# EAGLE board table_tiles_tlc (EAGLE 5.11)
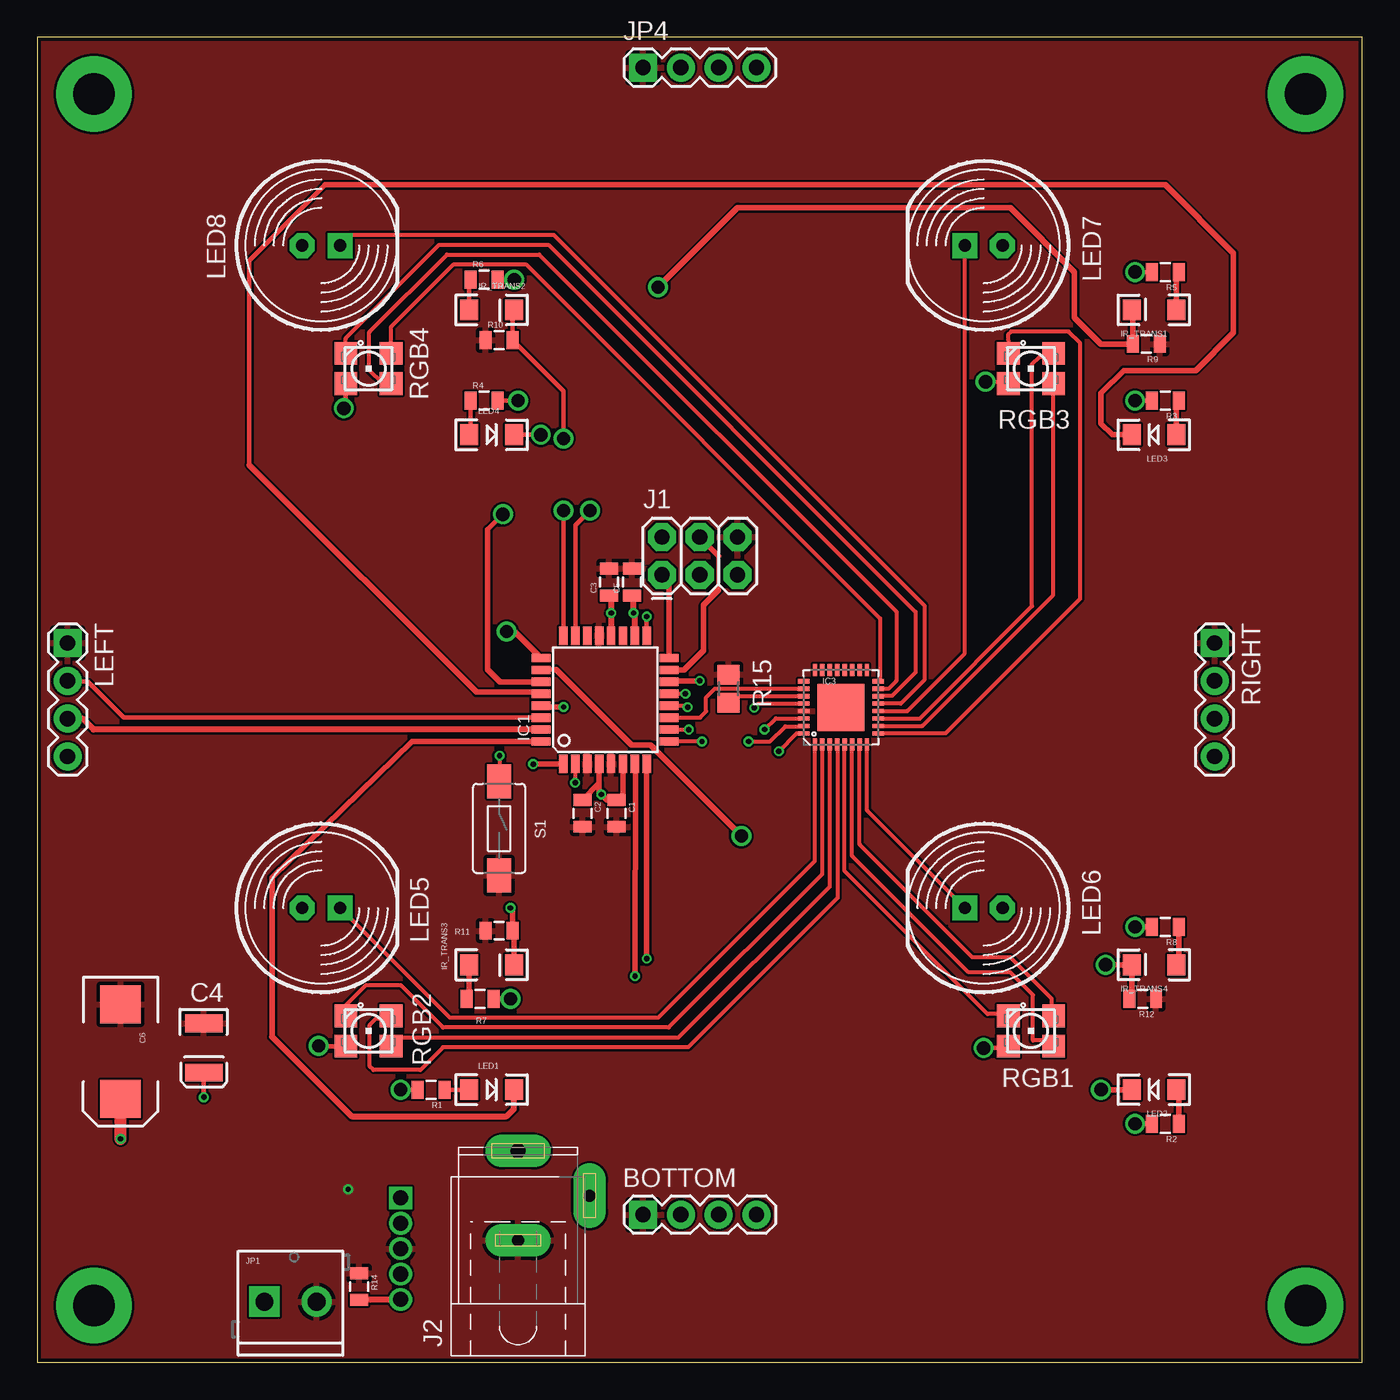
[diagram p0: board, top side]
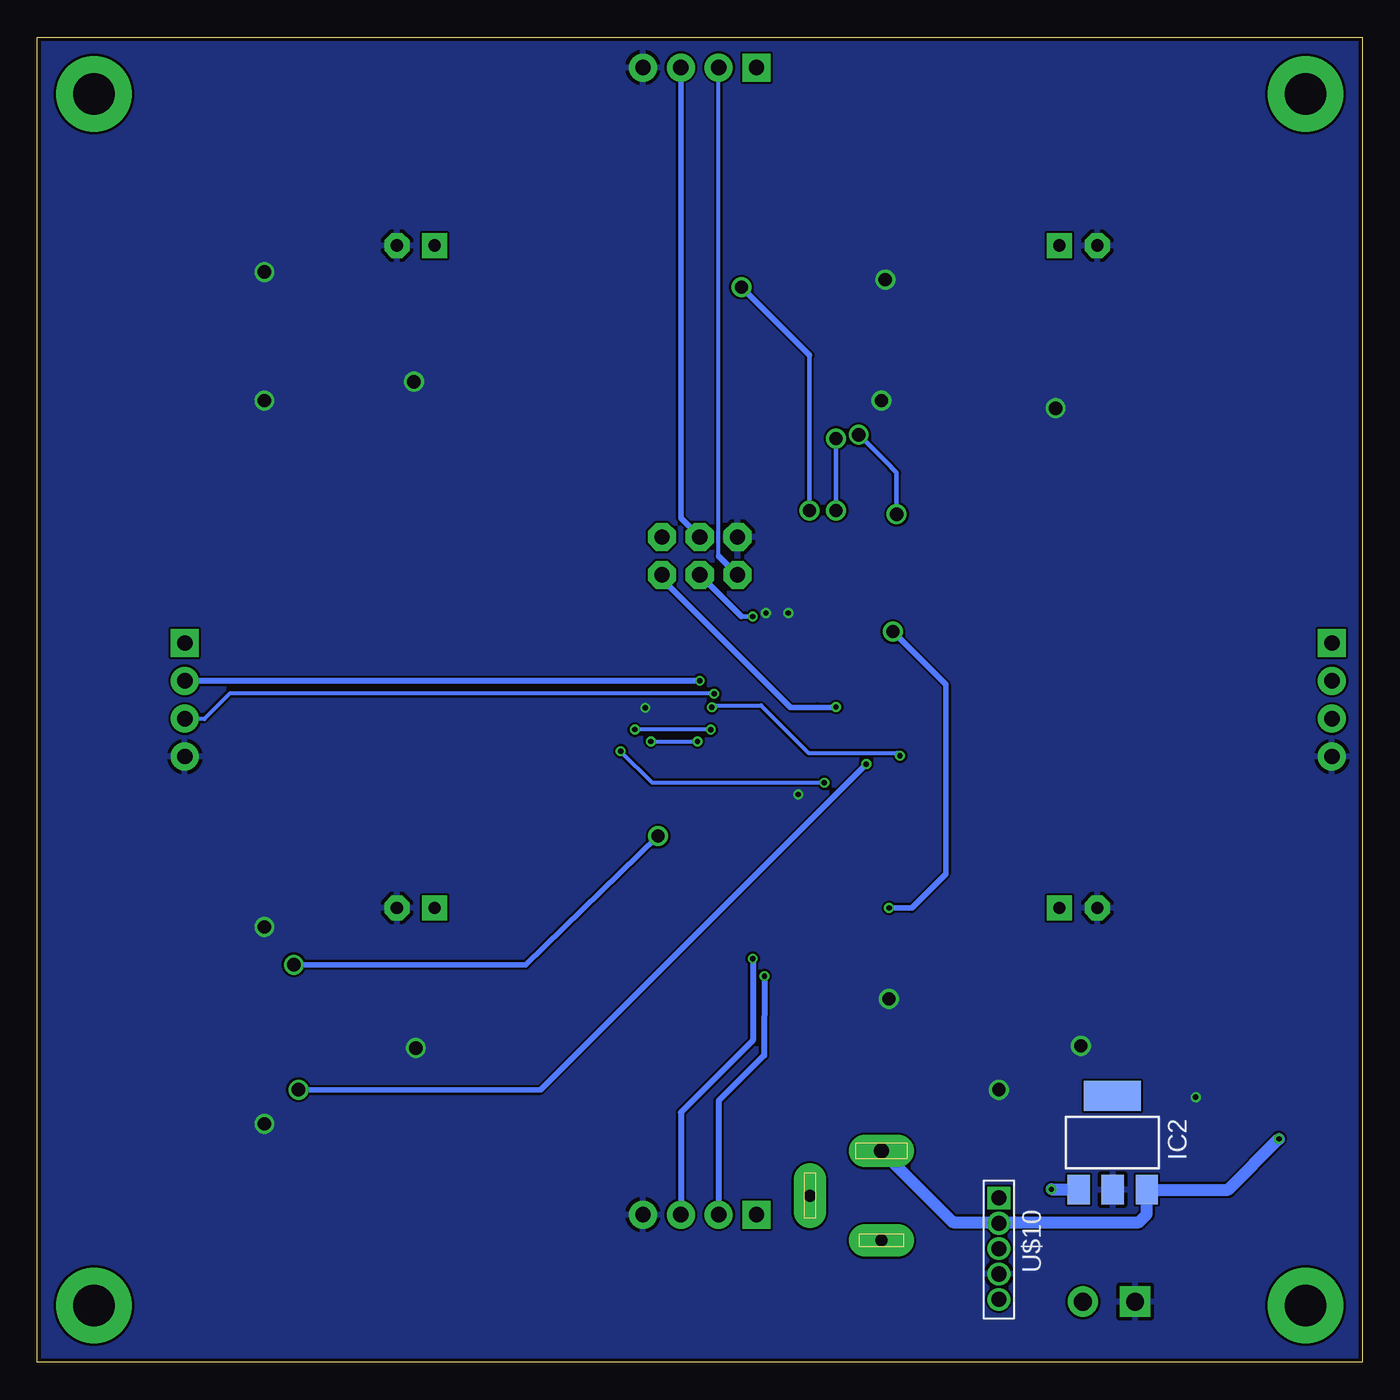
[diagram p1: board, bottom side, seen from below]

Size 88.9 x 88.9 mm. Coordinates in mm from the lower left corner, seen from the top.
Outline: 0,0 88.9,0 88.9,88.9 0,88.9 0,0
Copper layers (1*16): Top 0.035mm / dielectric 1.5mm / Bottom 0.035mm
Design rules "ITead_rule": minimum track width 6mil, minimum drill 12mil, track to track 6mil, track to pad 6mil, pad to pad 6mil, via to via 6mil, smd to smd 0mil, copper to edge 10mil, drill to drill 10mil, minimum pad ring 10mil, minimum via ring 6mil, stop-mask expansion 2mil, vias tented up to drill 100mil, thermal gap 10mil

## Footprints (pad centres in the part's own frame; a part is rotated, then mirrored left to right if it is on the bottom)
1X04 = drill 1.016 pad 1.88 square: 1 0,0 | drill 1.016 pad 1.88 round: 2 2.54,0; 3 5.08,0; 4 7.62,0
0805 = smd 0.8 x 1.2: 1 -0.9,0; 2 0.9,0
EIA3528 = smd 1.2 x 2.5: A 1.65,0; C -1.65,0
EIA7343 = smd 2.55 x 2.7: A 3.17,0; C -3.17,0
TQFP32-08 = smd 1.27 x 0.559: 1 -4.293,2.8; 2 -4.293,2; 3 -4.293,1.2; 4 -4.293,0.4; 5 -4.293,-0.4; 6 -4.293,-1.2; 7 -4.293,-2; 8 -4.293,-2.8; 17 4.293,-2.8; 18 4.293,-2; 19 4.293,-1.2; 20 4.293,-0.4; 21 4.293,0.4; 22 4.293,1.2; 23 4.293,2; 24 4.293,2.8 | smd 0.559 x 1.27: 9 -2.8,-4.293; 10 -2,-4.293; 11 -1.2,-4.293; 12 -0.4,-4.293; 13 0.4,-4.293; 14 1.2,-4.293; 15 2,-4.293; 16 2.8,-4.293; 25 2.8,4.293; 26 2,4.293; 27 1.2,4.293; 28 0.4,4.293; 29 -0.4,4.293; 30 -1.2,4.293; 31 -2,4.293; 32 -2.8,4.293
SOT223 = smd 1.499 x 2.007: 1 -2.261,-3.15; 2 0.025,-3.15; 3 2.311,-3.15 | smd 3.81 x 2.007: 4 0,3.15
QFN32_XLP = smd 0.285 x 0.8: 1 -1.75,-2.5; 2 -1.25,-2.5; 3 -0.75,-2.5; 4 -0.25,-2.5; 5 0.25,-2.5; 6 0.75,-2.5; 7 1.25,-2.5; 8 1.75,-2.5; 17 1.75,2.5; 18 1.25,2.5; 19 0.75,2.5; 20 0.25,2.5; 21 -0.25,2.5; 22 -0.75,2.5; 23 -1.25,2.5; 24 -1.75,2.5 | smd 0.8 x 0.285: 9 2.5,-1.75; 10 2.5,-1.25; 11 2.5,-0.75; 12 2.5,-0.25; 13 2.5,0.25; 14 2.5,0.75; 15 2.5,1.25; 16 2.5,1.75; 25 -2.5,1.75; 26 -2.5,1.25; 27 -2.5,0.75; 28 -2.5,0.25; 29 -2.5,-0.25; 30 -2.5,-0.75; 31 -2.5,-1.25; 32 -2.5,-1.75 | smd 3.15 x 3.15: EP 0,0
PT26-21B = smd 1.2 x 1.4: A -1.5,0; C 1.5,0
2X3 = drill 1.016 pad 1.88 octagon: 1 0,0; 2 0,2.54; 3 2.54,0; 4 2.54,2.54; 5 5.08,0; 6 5.08,2.54
SPC4078 = drill 0.8 pad 2.184 long: 1 -3,0; 2 0,-4.8 | drill 1 pad 2.184 long: 3 3,0
SCREWTERMINAL-3.5MM-2 = drill 1.2 pad 2.032 square: 1 0,0 | drill 1.2 pad 2.032 round: 2 3.5,0
LED-1206 = smd 1.2 x 1.4: A -1.5,0; C 1.5,0
LED10MM = drill 0.813 pad 1.676 octagon: A -1.27,0 | drill 0.813 pad 1.676 square: K 1.27,0
R0805 = smd 1.3 x 1.5: 1 -0.95,0; 2 0.95,0
PLCC4 = smd 1.524 x 1.524: 1 -1.524,1.016; 2 -1.524,-1.016; 3 1.524,-1.016; 4 1.524,1.016
TACTILE-SWITCH-1101NE = smd 2.3 x 1.6: P$1 -3.15,0; P$2 3.15,0
SLTS284E = drill 1.016 pad 1.27 square: 1 -3.404,0 | drill 1.016 pad 1.27 round: 2 -1.702,0; 3 0,0; 4 1.702,0 | drill 1.016 round: 5 3.404,0

## Placement (x,y rotation side)
BOTTOM  [1X04]  40.64,9.91 0 top
C1  [0805]  38.86,36.83 270 top
C2  [0805]  36.58,36.83 270 top
C3  [0805]  38.35,52.35 90 top
C4  [EIA3528]  11.18,21.08 270 top
C5  [0805]  39.9,52.35 90 top
C6  [EIA7343]  5.59,20.83 270 top
IC1  MEGA8-AI  [TQFP32-08]  38.1,44.45 90 top
IC2  REG1117  [SOT223]  16.76,14.73 0 bottom
IC3  TLC5947XLP  [QFN32_XLP]  53.92,43.94 0 top
IR_TRANS1  PT26-21B  [PT26-21B]  74.93,70.61 180 top
IR_TRANS2  PT26-21B  [PT26-21B]  30.48,70.61 0 top
IR_TRANS3  PT26-21B  [PT26-21B]  30.48,26.67 0 top
IR_TRANS4  PT26-21B  [PT26-21B]  74.93,26.67 180 top
J1  AVR_SPI_PRG_6PTH  [2X3]  41.91,52.83 0 top
J2  [SPC4078]  32.26,11.18 90 top
JP1  [SCREWTERMINAL-3.5MM-2]  15.24,4.06 0 top
JP4  [1X04]  40.64,86.87 0 top
LED1  [LED-1206]  30.48,18.29 0 top
LED2  [LED-1206]  74.93,18.29 180 top
LED3  [LED-1206]  74.93,62.23 180 top
LED4  [LED-1206]  30.48,62.23 0 top
LED5  [LED10MM]  19.05,30.48 0 top
LED6  [LED10MM]  63.5,30.48 180 top
LED7  [LED10MM]  63.5,74.93 180 top
LED8  [LED10MM]  19.05,74.93 0 top
LEFT  [1X04]  2.03,48.26 270 top
R1  [0805]  26.42,18.29 180 top
R2  [0805]  75.69,16 180 top
R3  [0805]  75.69,64.52 180 top
R4  [0805]  29.97,64.52 0 top
R5  100  [0805]  75.69,73.15 180 top
R6  100  [0805]  29.97,72.64 0 top
R7  100  [0805]  29.72,24.38 0 top
R8  100  [0805]  75.69,29.21 180 top
R9  [0805]  74.42,68.33 180 top
R10  [0805]  30.99,68.58 0 top
R11  [0805]  30.99,28.96 0 top
R12  [0805]  74.17,24.38 180 top
R14  [0805]  21.59,5.08 270 top
R15  20K  [R0805]  46.38,45.19 270 top
RGB1  CLVBA-FK  [PLCC4]  66.68,22.23 0 top
RGB2  CLVBA-FK  [PLCC4]  22.23,22.23 0 top
RGB3  CLVBA-FK  [PLCC4]  66.68,66.68 0 top
RGB4  CLVBA-FK  [PLCC4]  22.23,66.68 0 top
RIGHT  [1X04]  78.99,48.26 270 top
S1  SWITCH-MOMENTARY-2-SMD-1101NE  [TACTILE-SWITCH-1101NE]  30.99,35.81 270 top
U$10  SLTS284ETI  [SLTS284E]  24.38,7.62 270 bottom

## Library data of the parts
BOTTOM C1-C3 C5 J1 JP1 JP4 LEFT R1-R12 R14 RIGHT S1 = SparkFun
C4 C6 IC3 = slice_noshift
IC1 = atmel; MPN: ATMEGA8-16AU; OC_FARNELL: 9171371; OC_NEWARK: 73M8863
IC2 = burr-brown; MPN: REG1117; OC_FARNELL: 1097566; OC_NEWARK: 14P6981
IR_TRANS1-IR_TRANS4 LED1-LED4 = table_tiles
J2 = con-jack; OC_FARNELL: unknown; OC_NEWARK: unknown
LED5-LED8 = led
R15 = rcl
RGB1-RGB4 = rf_blinky
U$10 = PWM

## Nets
BLANK: IC1.10 IC3.30
BOTTOM_IN: BOTTOM.3 IC1.8
BOTTOM_OUT: BOTTOM.2 IC1.7
COL17: IC3.17
COL18: IC3.18
COL19: IC3.19
COL20: IC3.20
COL21: IC3.21
COL22: IC3.22
COL23: IC3.23
COL24: IC3.24
GND: BOTTOM.1 C1.2 C2.2 C3.2 C4.C C5.2 C6.C IC1.3 IC1.5 IC1.21 IC2.1 IC3.29 J1.6 J2.1 JP1.2 JP4.1 LEFT.1 R9.1 R10.1 R11.1 R12.1 R14.1 R15.1 RIGHT.1 S1.P$2 U$10.3
IR0: IC1.32 LED1.C
IR1: IC1.1 LED2.C
IR2: IC1.28 LED3.C
IR3: IC1.27 LED4.C
LEFT_IN: IC1.31 LEFT.3
LEFT_OUT: IC1.30 LEFT.2
MISO: IC1.16 J1.1 JP4.2
MOSI: IC1.15 J1.4 JP4.3
N$4: R14.2 U$10.5
N$5: LED4.A R4.1
N$6: LED3.A R3.1
N$7: LED2.A R2.1
N$8: LED1.A R1.1
N$9: IR_TRANS1.A R5.1
N$10: IR_TRANS2.A R6.1
N$11: IR_TRANS3.A R7.1
N$12: IR_TRANS4.A R8.1
N$14: IC3.27 R15.2
N$16: IC1.12 S1.P$1
OUT0: IC3.1 LED5.K
OUT1: IC3.2 RGB2.1
OUT2: IC3.3 RGB2.3
OUT3: IC3.4 RGB2.4
OUT4: IC3.5 RGB1.1
OUT5: IC3.6 RGB1.3
OUT6: IC3.7 RGB1.4
OUT7: IC3.8 LED6.K
OUT8: IC3.9 RGB3.1
OUT9: IC3.10 RGB3.3
OUT10: IC3.11 RGB3.4
OUT11: IC3.12 LED7.K
OUT12: IC3.13 LED8.K
OUT13: IC3.14 RGB4.1
OUT14: IC3.15 RGB4.3
OUT15: IC3.16 RGB4.4
POWER_IN: C6.A IC2.3 J2.3 U$10.2
RST: IC1.29 J1.5
RT_IN: IC1.14 RIGHT.2
RT_OUT: IC1.13 RIGHT.3
SCK: IC1.17 J1.3
SCLK: IC1.9 IC3.31
SENSOR0: IC1.23 IR_TRANS1.C R9.2
SENSOR1: IC1.24 IR_TRANS2.C R10.2
SENSOR2: IC1.25 IR_TRANS3.C R11.2
SENSOR3: IC1.26 IR_TRANS4.C R12.2
SIN: IC1.2 IC3.32
VCC: BOTTOM.4 C1.1 C2.1 C3.1 C4.A C5.1 IC1.4 IC1.6 IC1.18 IC1.20 IC2.2 IC3.28 J1.2 JP1.1 JP4.4 LED5.A LED6.A LED7.A LED8.A LEFT.4 R1.2 R2.2 R3.2 R4.2 R5.2 R6.2 R7.2 R8.2 RGB1.2 RGB2.2 RGB3.2 RGB4.2 RIGHT.4 U$10.4
XLAT: IC1.11 IC3.26

## Tracks (layer width: path | path; a pad name or v marks a point on that pad's centre or on a via)
BLANK  (via drill 0.36)
  Top 0.254: v48.8,42.45 49.56,43.21 51.41,43.21 IC3.30 | v43.71,42.44 IC1.10
  Bottom 0.254: v48.8,42.45 v43.72,42.45 v43.71,42.44
BOTTOM_IN  (via drill 0.36)
  Top 0.305: IC1.8
  Top 0.356: IC1.8 v40.89,27.08
  Bottom 0.406: v40.89,27.08 40.89,21.59 45.72,16.76 BOTTOM.3
BOTTOM_OUT  (via drill 0.36)
  Top 0.305: IC1.7 40.13,40.12
  Top 0.356: 40.13,40.12 v40.11,25.91
  Bottom 0.406: v40.11,25.91 40.13,20.57 43.18,17.53 BOTTOM.2
GND  (via drill 0.36)
  Bottom 0.813: IC2.1 19.05,11.61 v20.85,11.61
  pour Top: -0.51,89.41 89.41,89.41 89.41,-0.51 -0.51,-0.51
IR0
  Top 0.305: LED1.C 32,18.31
  Top 0.356: 15.75,21.84 15.75,32.51 25.14,41.65 IC1.32
  Top 0.406: 15.75,21.84 21.08,16.51 31.5,16.51 31.98,16.99 LED1.C
IR1  (via drill 0.36, 0.89)
  Top 0.305: 35.28,40.13 IC1.1
  Top 0.356: v33.27,40.13 35.28,40.13 | v71.37,18.29 LED2.C
  Bottom 0.356: v33.27,40.13 55.12,18.29 v71.37,18.29
IR2
  Top 0.305: 19.3,78.99 14.22,73.91 14.22,64.01 14.22,60.2 | 33.7,44.96 IC1.28
  Top 0.356: LED3.C 72.14,62.23 71.37,62.99 71.37,65.02 72.9,66.55 77.72,66.55 80.26,69.09 80.26,74.42 75.69,78.99 19.3,78.99 | 14.22,60.2 29.46,44.96 33.7,44.96
IR3  (via drill 0.89)
  Top 0.305: v31.24,56.9 30.23,55.88 | v33.78,62.23 LED4.C
  Top 0.356: IC1.27 31.06,45.65 30.23,46.48 30.23,55.88
  Bottom 0.305: v33.78,62.23 32,60.45 31.24,59.69 v31.24,56.9
LEFT_IN
  Top 0.406: IC1.31 3.78,42.45 3.05,43.18 LEFT.3
LEFT_OUT
  Top 0.305: LEFT.2 2.08,45.67 3.38,45.67 5.79,43.26 IC1.30
MISO
  Top 0.356: IC1.16 42.39,52.35 J1.1
  Bottom 0.254: 43.18,54.1 JP4.2
  Bottom 0.356: J1.1 43.18,54.1
MOSI
  Top 0.254: 45.72,51.82 45.72,54.1
  Top 0.356: IC1.15 43.4,46.45 44.7,47.75 44.7,50.8 45.72,51.82 | 45.72,54.1 J1.4
  Bottom 0.356: JP4.3 45.72,56.64 J1.4
N$1  (via drill 2.8 pad 5.08)
  other vias: 3.81,3.81
N$2  (via drill 2.8 pad 5.08)
  other vias: 3.81,85.09
N$3  (via drill 2.8 pad 5.08)
  other vias: 85.09,85.09
N$4
  Top 0.406: R14.2 24.38,4.18 U$10.5
N$5
  Top 0.305: LED4.A 29.07,62.32 R4.1
N$6
  Top 0.305: 76.43,64.35 R3.1
  Top 0.356: LED3.A 76.43,64.35
N$7
  Top 0.305: 76.59,18.13 LED2.A
  Top 0.356: R2.1 76.59,18.13
N$8
  Top 0.305: LED1.A R1.1
N$9
  Top 0.305: 76.43,72.99 R5.1
  Top 0.356: IR_TRANS1.A 76.43,72.99
N$10
  Top 0.305: R6.1 28.98,72.55 IR_TRANS2.A
N$11
  Top 0.356: IR_TRANS3.A 28.98,24.55 R7.1
N$12
  Top 0.305: IR_TRANS4.A 76.59,26.83
  Top 0.356: 76.59,26.83 R8.1
N$13  (via drill 2.8 pad 5.08)
  other vias: 85.09,3.81
N$14
  Top 0.254: IC3.27 46.86,44.69 R15.2
N$16  (via drill 0.36)
  Top 0.254: IC1.12 43.53,44.05 v43.64,43.94 | v31.01,40.69 31.01,38.99 S1.P$1
  Bottom 0.254: v31.01,40.69 31.22,40.89 37.16,40.89 40.34,44.07 43.51,44.07 v43.64,43.94
OUT0
  Top 0.254: LED5.K 27.69,23.11 41.66,23.11 52.17,33.63 IC3.1
OUT1
  Top 0.254: RGB2.1 20.65,23.9 22.02,25.27 24.41,25.27 27.23,22.45 42.37,22.45 52.67,32.76 IC3.2
OUT2
  Top 0.254: RGB2.3 24.31,21.77 43,21.77 53.17,31.94 IC3.3
OUT3
  Top 0.254: RGB2.4 23.57,23.06 22.73,23.06 22.3,22.63 22.3,19.86 22.56,19.61 25.71,19.61 27.23,21.13 43.66,21.13 53.7,31.17 53.7,41.42 IC3.4
OUT4
  Top 0.254: 65.02,23.37 63.75,23.37 54.17,32.95 IC3.5
  Top 0.305: RGB1.1 65.02,23.37
OUT5
  Top 0.254: 67.82,21.59 66.8,21.59 66.8,24.64 65.28,26.16 62.48,26.16 54.67,33.97 IC3.6
  Top 0.305: RGB1.3 67.82,21.59
OUT6
  Top 0.254: 68.07,23.37 68.07,24.38 65.28,27.18 62.74,27.18 55.17,34.74 IC3.7
  Top 0.305: RGB1.4 68.07,23.37
OUT7
  Top 0.254: LED6.K 55.67,37.04 IC3.8
OUT8
  Top 0.254: RGB3.1 65.15,68.58 65.13,68.61 65.13,68.94 65.35,69.16 69.19,69.16 69.98,68.38 69.98,51.23 60.96,42.22 56.45,42.22 IC3.9
OUT9
  Top 0.254: RGB3.3 68.17,65.63 68.17,51.49 59.38,42.69 IC3.10
OUT10
  Top 0.254: RGB3.4 68,67.49 67.28,67.49 66.75,66.95 66.75,50.72 59.22,43.19 IC3.11
OUT11
  Top 0.254: 62.28,74.88 LED7.K 62.23,47.55 58.37,43.69 | IC3.12 58.37,43.69 | 58.37,43.69 58.37,43.71
OUT12
  Top 0.254: IC3.13 57.94,44.2 59.51,45.77 59.51,50.78 34.65,75.64 21.03,75.64 LED8.K
OUT13
  Top 0.254: RGB4.1 20.7,68.71 26.98,74.98 34.29,74.98 58.93,50.34 58.93,46.28 57.35,44.7 56.44,44.7 IC3.14
OUT14
  Top 0.254: RGB4.3 23.19,65.66 22.28,66.57 22.28,69.11 27.48,74.32 33.68,74.32 57.63,50.37 57.63,45.72 57.1,45.19 IC3.15
OUT15
  Top 0.254: RGB4.4 23.75,69.47 27.94,73.66 32.79,73.66 56.54,49.91 56.54,45.81 IC3.16
POWER_IN  (via drill 0.36)
  Top 0.813: v5.59,14.99 C6.A
  Bottom 0.813: v5.59,14.99 8.99,11.58 IC2.3 14.45,9.93 14.99,9.4 24.38,9.4 | 24.38,9.4 U$10.2 | 24.38,9.4 27.48,9.4 J2.3
RST  (via drill 0.36)
  Top 0.356: v35.31,43.97 33.81,43.97 IC1.29
  Bottom 0.356: J1.5 46.74,52.58 46.74,52.32 38.35,43.94 36.58,43.94 35.31,43.94 v35.31,43.97
RT_IN  (via drill 0.36)
  Top 0.305: IC1.14 42.46,45.72
  Top 0.356: 42.46,45.72 v44.45,45.72
  Bottom 0.406: v44.45,45.72 RIGHT.2
RT_OUT  (via drill 0.36)
  Top 0.254: v43.48,44.86 IC1.13
  Bottom 0.254: v43.48,44.86 76,44.86 77.7,43.16 78.97,43.16 RIGHT.3
SCK  (via drill 0.36)
  Top 0.305: IC1.17 v40.89,50.04
  Bottom 0.305: v40.89,50.04 41.66,50.04
  Bottom 0.356: 41.66,50.04 J1.3
SCLK  (via drill 0.36)
  Top 0.254: IC3.31 51.4,42.67 50.19,42.67 49.17,41.65 v47.73,41.65 v47.73,41.66 | v44.6,41.66 IC1.9
  Bottom 0.254: v47.73,41.66 v44.6,41.66
SENSOR0  (via drill 0.89)
  Top 0.305: 73.52,70.52 IR_TRANS1.C | v37.08,57.15 36.1,56.17 IC1.23
  Top 0.356: 73.52,70.52 R9.2 71.37,68.33 69.6,70.1 69.6,73.15 65.28,77.47 46.99,77.47 v41.66,72.14
  Bottom 0.305: v37.08,57.15 37.08,67.56
  Bottom 0.356: 37.08,67.56 v41.66,72.14
SENSOR1  (via drill 0.89)
  Top 0.305: IR_TRANS2.C 31.89,70.52 R10.2 35.31,65.16 v35.31,61.98 | IC1.24 v35.3,57.14 v35.31,57.15
  Bottom 0.305: v35.31,57.15 v35.31,61.98
SENSOR2  (via drill 0.36, 0.89)
  Top 0.305: R11.2 31.98,28.86 | v31.75,30.48 31.89,30.34
  Top 0.356: 31.98,28.86 IR_TRANS3.C | IC1.25 32.04,49.02 v31.5,49.02 | 31.89,30.34 R11.2
  Bottom 0.356: v31.5,49.02 27.94,45.47 27.94,32.77 30.23,30.48 v31.75,30.48
SENSOR3  (via drill 0.89)
  Top 0.305: 73.43,24.55 R12.2 | IC1.26 33.84,46.48 34.8,46.48
  Top 0.356: 73.43,24.55 IR_TRANS4.C v71.68,26.67 | 34.8,46.48 39.88,41.4 41.15,41.4 v47.24,35.31
  Bottom 0.356: v47.24,35.31 56.13,26.67 v71.68,26.67
SIN  (via drill 0.36)
  Top 0.254: IC1.2 v36.1,38.89 v36.09,38.89 | v49.76,41 50.96,42.19 IC3.32
  Bottom 0.254: v36.09,38.89 47.65,38.89 v49.76,41
VCC  (via drill 0.36, 0.89)
  Top 0.254: v63.63,65.79 65.02,65.79 | IC3.28 48.38,44.19 v48.11,43.92
  Top 0.305: 65.02,65.79 RGB3.2 | v20.57,64.01 20.7,64.14 RGB4.2 | R4.2 v32.26,64.52 | R6.2 v32,72.64 | R5.2 v73.66,73.15 | R3.2 v73.66,64.52 | v63.5,21.08 65.02,21.08 RGB1.2 | IC1.18 40.13,48.78 | v18.87,21.23 19.43,21.21 RGB2.2 | R1.2 v24.38,18.29 | IC1.4 37.7,39.62 37.7,38.85 | 39.3,38.17 C1.1 | C4.A v11.18,17.78
  Top 0.356: R8.2 v73.66,29.21 | R2.2 v73.66,16 | 37.7,38.85 C2.1 | IC1.6 39.3,38.17 | C1.1 38.22,37.73 v37.85,38.1 37.7,38.25 37.7,39.62 | R7.2 v31.75,24.38
  Top 0.406: C3.1 38.51,51.45 v38.51,50.27 v38.5,50.27 IC1.20 | C5.1 40.01,51.48 v40.01,50.27 40.1,50.27 IC1.18
  pour Bottom: -0.51,89.92 89.92,89.92 89.92,-1.52 -0.51,-1.52
XLAT
  Top 0.254: IC3.26 45.47,45.19 44.88,44.6 44.88,43.66 44.48,43.26 IC1.11